# EAGLE board magspoof (EAGLE 8.4.1)
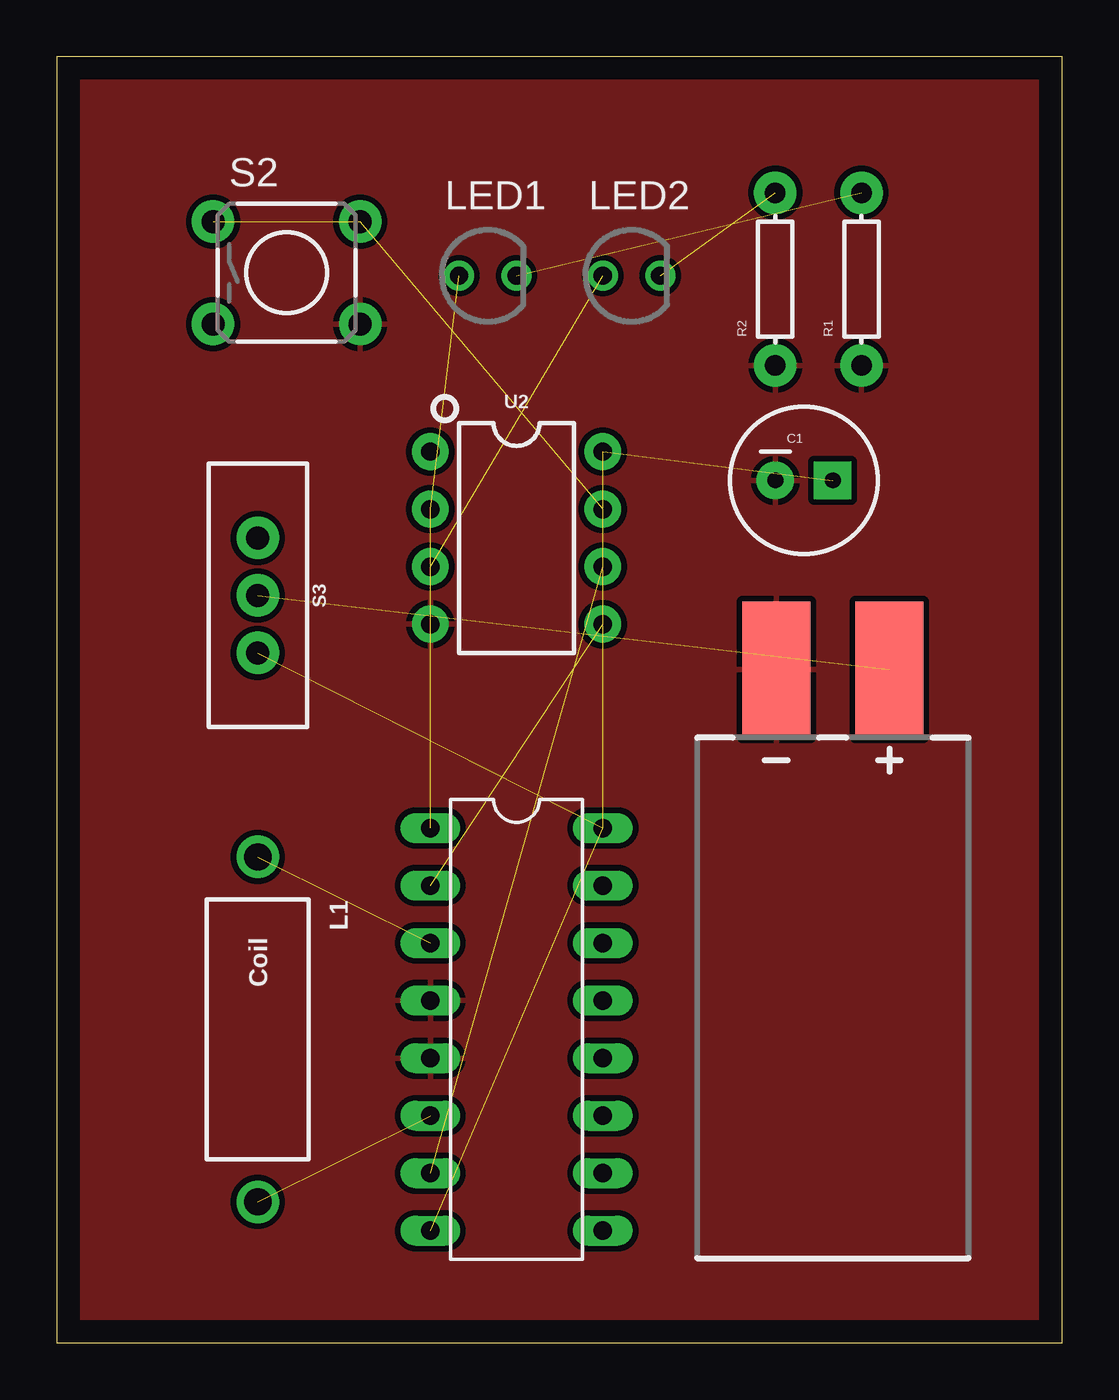
[diagram p0: board, top side]

Size 44.43 x 56.82 mm. Coordinates in mm from the lower left corner, seen from the top.
Outline: 0,0 44.43,0 44.43,56.82 0,56.82 0,0
Copper layers (1*16): Top 0.035mm / dielectric 1.5mm / Bottom 0.035mm
Design rules "default": minimum track width 6mil, minimum drill 0.35mm, track to track 6mil, track to pad 6mil, pad to pad 6mil, via to via 6mil, smd to smd 6mil, copper to edge 40mil, drill to drill 6mil, minimum pad ring 10mil, minimum via ring 8mil, stop-mask expansion 4mil, vias tented up to drill 0mil, thermal gap 10mil
Net classes: 0 default: width 0.305 mm, drill 0.508 mm, clearance 0.254 mm; 1 power: width 0.508 mm, drill 0.508 mm, clearance 0.254 mm

## Footprints (pad centres in the part's own frame; a part is rotated, then mirrored left to right if it is on the bottom)
LIPO-110-TABS = smd 3 x 6: + 2.5,14.5; - -2.5,14.5
CPOL-RADIAL-100UF-25V = drill 0.7 pad 1.651 square: 1 1.27,0 | drill 0.7 pad 1.651: 2 -1.27,0
DIL16 = drill 0.813 long: 1 -8.89,-3.81; 2 -6.35,-3.81; 3 -3.81,-3.81; 4 -1.27,-3.81; 5 1.27,-3.81; 6 3.81,-3.81; 7 6.35,-3.81; 8 8.89,-3.81; 9 8.89,3.81; 10 6.35,3.81; 11 3.81,3.81; 12 1.27,3.81; 13 -1.27,3.81; 14 -3.81,3.81; 15 -6.35,3.81; 16 -8.89,3.81
AXIAL-0.6 = drill 1.2 pad 1.88: P$1 -7.62,0; P$2 7.62,0
LED3MM-NS = drill 0.813: A -1.27,0; K 1.27,0
AXIAL-0.3 = drill 0.9 pad 1.88: P$1 -3.81,0; P$2 3.81,0
TACTILE-PTH = drill 1.016 pad 1.88: 1 -3.251,2.261; 2 3.251,2.261; 3 -3.251,-2.261; 4 3.251,-2.261
SWITCH_SPDT_PTH_11.6X4.0MM = drill 1.016 pad 1.88: 1 0,2.54; 2 0,0; 3 0,-2.54
DIP08_MCU = drill 0.813 pad 1.626: 1 -3.81,-3.81; 2 -1.27,-3.81; 3 1.27,-3.81; 4 3.81,-3.81; 5 3.81,3.81; 6 1.27,3.81; 7 -1.27,3.81; 8 -3.81,3.81

## Placement (x,y rotation side)
BAT1  3.7V LiPo  [LIPO-110-TABS]  34.29,15.24 0 top
C1  100uF  [CPOL-RADIAL-100UF-25V]  33.02,38.1 0 top
IC1  L293D  [DIL16]  20.32,13.85 270 top
L1  Coil  [AXIAL-0.6]  8.89,13.85 270 top
LED1  [LED3MM-NS]  19.05,47.14 0 top
LED2  [LED3MM-NS]  25.4,47.14 0 top
R1  100ohm  [AXIAL-0.3]  35.56,46.99 90 top
R2  100ohm  [AXIAL-0.3]  31.75,46.99 90 top
S2  [TACTILE-PTH]  10.16,47.27 0 top
S3  [SWITCH_SPDT_PTH_11.6X4.0MM]  8.89,33.02 180 top
U2  TINY85-20-DIP  [DIP08_MCU]  20.32,35.56 270 top

## Library data of the parts
BAT1 = SparkFun-Electromechanical
C1 = SparkFun-Capacitors
IC1 = st-microelectronics; MPN: L293D; OC_FARNELL: 9589619; OC_NEWARK: 56P8249
L1 R1 R2 = SparkFun-Passives
LED1 LED2 = SparkFun-LED
S2 = SparkFun-Retired
S3 = SparkFun-Switches; PROD_ID: SWCH-08261; SF_SKU: COM-00102
U2 = SparkFun-Retired; PROD_ID: IC-09445

## Nets
GND: BAT1.- C1.2 IC1.4 IC1.5 R1.P$1 R2.P$1 S2.4 U2.4
GND3: IC1.13
GND4: IC1.12
N$1: IC1.3 L1.P$1
N$2 [power]: IC1.6 L1.P$2
N$3: IC1.2 U2.5
N$4: IC1.7 U2.6
N$5: IC1.1 LED1.A U2.2
N$6: LED2.K R2.P$2
N$7: LED1.K R1.P$2
N$8: S2.1 S2.2 U2.7
N$9: LED2.A U2.3
N$11: BAT1.+ S3.2
N$12: C1.1 IC1.8 IC1.16 S3.1 U2.8

## Tracks (layer width: path | path; a pad name or v marks a point on that pad's centre or on a via)
GND
  pour Top: -3.81,59.69 46.99,59.69 46.99,-2.54 -2.54,-2.54 -2.54,58.42
N$1  (1 unrouted)
N$2  (1 unrouted)
N$3  (1 unrouted)
N$4  (1 unrouted)
N$5  (2 unrouted)
N$6  (1 unrouted)
N$7  (1 unrouted)
N$8  (2 unrouted)
N$9  (1 unrouted)
N$11  (1 unrouted)
N$12  (4 unrouted)